# Altium PCB PCB2.PcbDoc
Units mm, origin at the board's own origin, x right, y up, seen from the top; angles counter-clockwise.
Board outline 25 x 50 mm, 2 copper layers (Top Layer, Bottom Layer); 50 components, 38 nets, 138 pads, 9 vias.
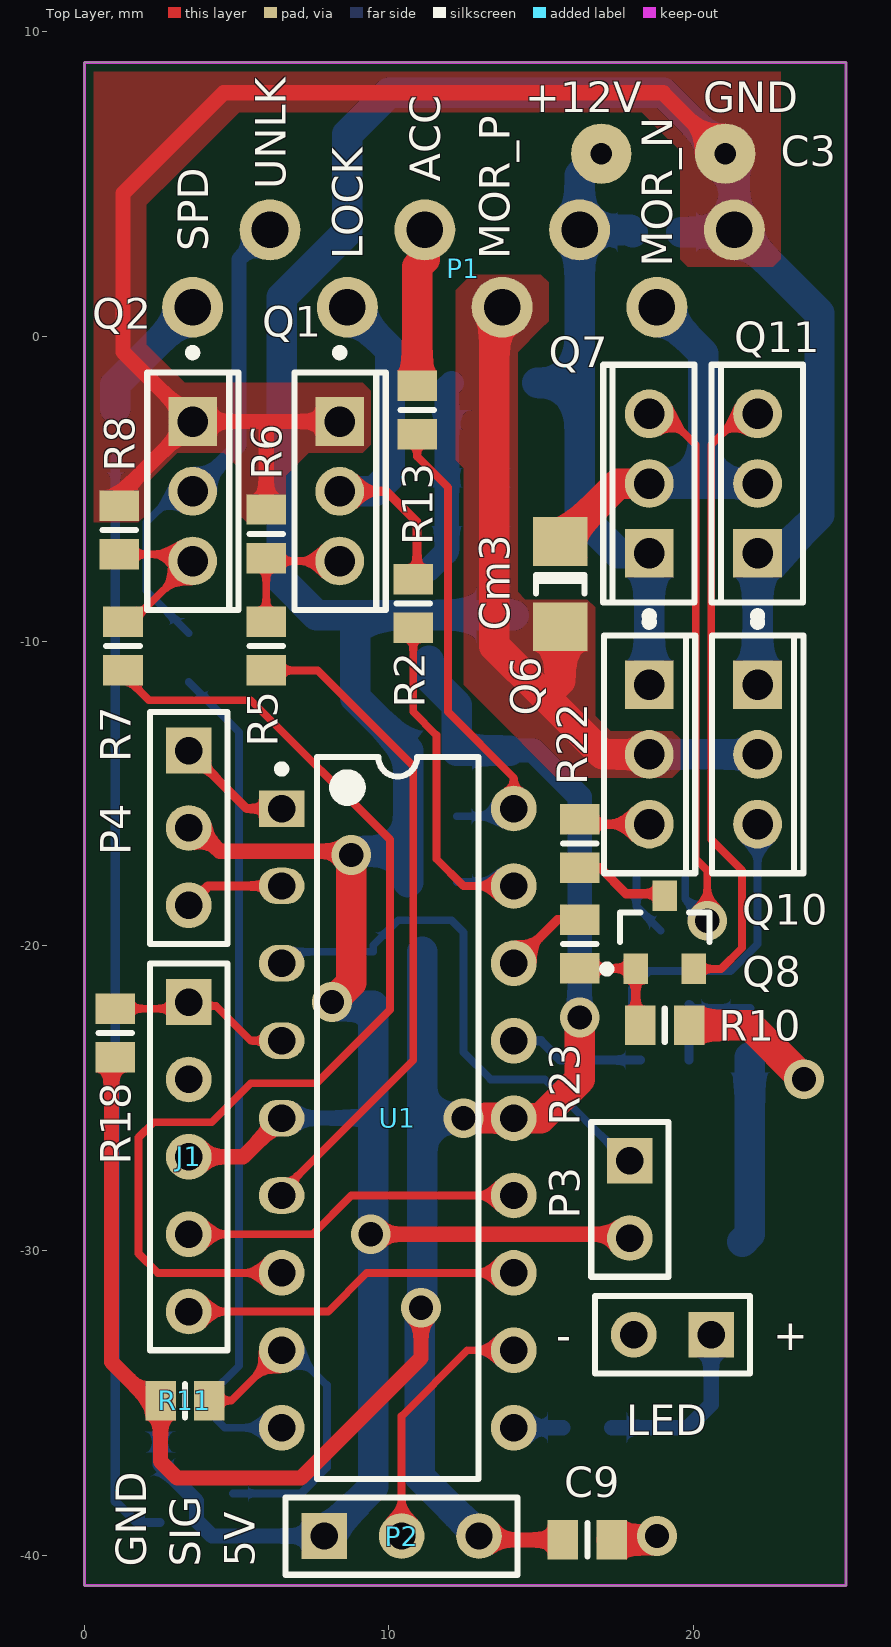
[diagram p0: Top Layer view]
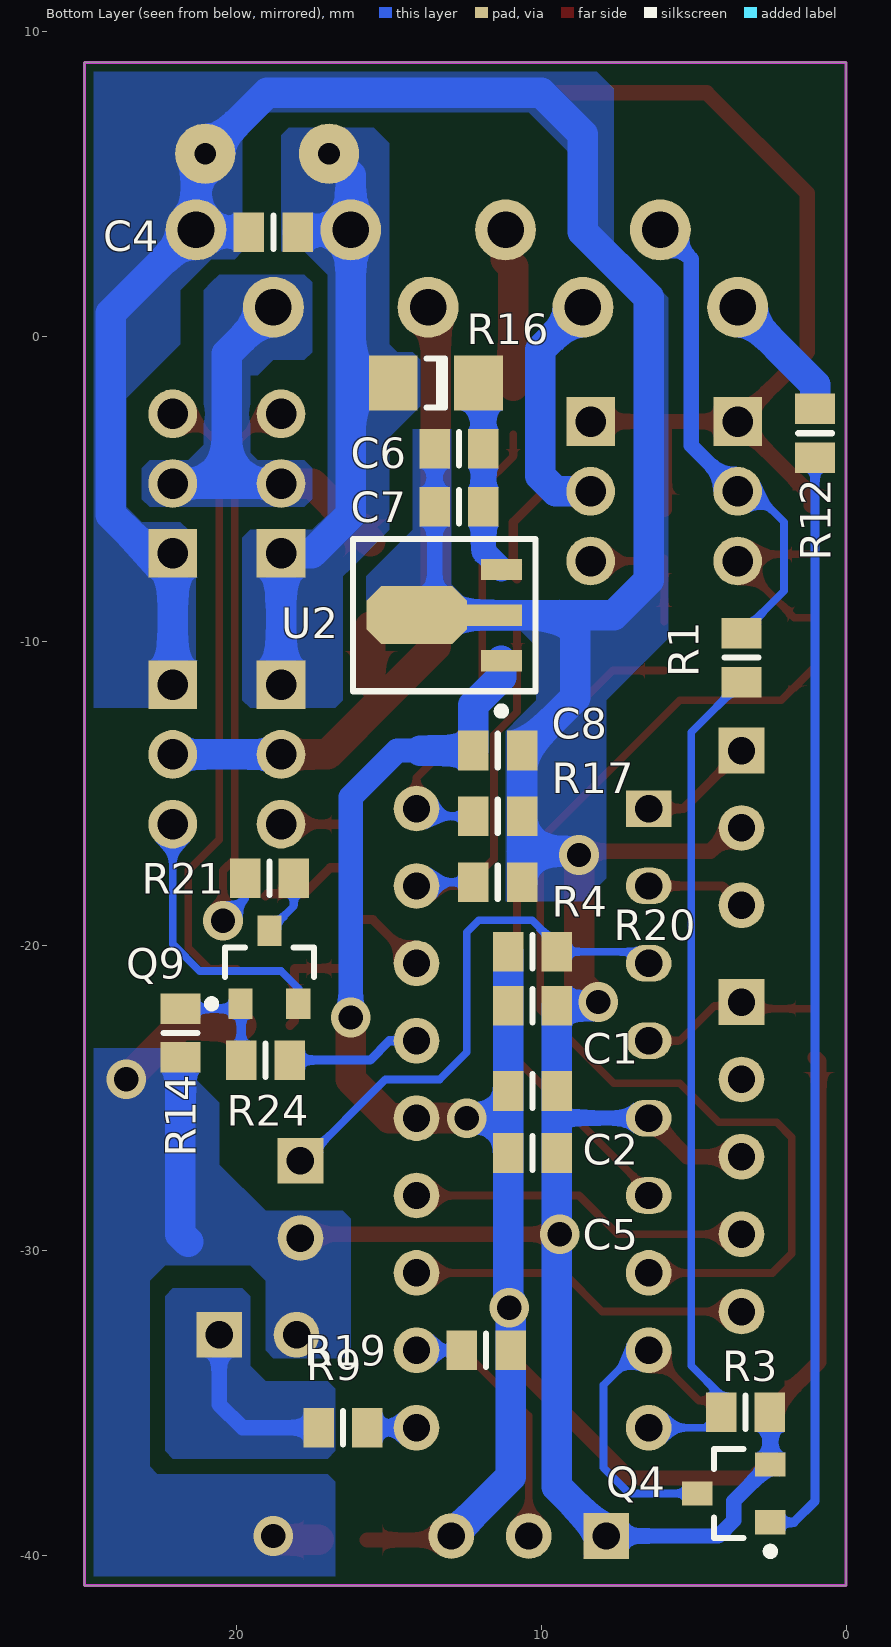
[diagram p1: Bottom Layer view, seen from below]

## Layer stack, top to bottom
Top Solder: solder mask 0.0102, Solder Resist, Dk 3.5
Top Layer: signal copper 0.0356
Dielectric1: dielectric 0.32, FR-4, Dk 4.8
Bottom Layer: signal copper 0.0356
Bottom Solder: solder mask 0.0102, Solder Resist, Dk 3.5

## Board outline
0,-41 0,9 25,9 25,-41

## Design rules (kind name [scope] priority, off if disabled: settings)
Clearance [All] p1: gap=0.254
HoleToHoleClearance [All] p1 off: gap=0.254 allowstackedmicrovias=TRUE
MinimumSolderMaskSliver [All] p1 off: minsoldermaskwidth=0.254
PolygonConnect [All] p1: connectstyle=Direct reliefconductorwidth=0.254 reliefentries=4 polygonreliefangle="90 Angle" airgapwidth=0.254
RoutingVias [All] p1: holewidth=0.711 width=1.27 viastyle="Through Hole" minholewidth=0.711 minwidth=1.27 maxholewidth=3 maxwidth=2
SilkToSolderMaskClearance SilkscreenOverComponentPads [IsPad] p1 off: minsilkscreentomaskgap=0.254 clearancetoexposedcopper=TRUE
SolderMaskExpansion [All] p1: expansion=0.102
Width [All] p1: maxlimit=2 minlimit=0.254 preferedwidth=0.3
27 further rules are at their usual default settings.

## Components (designator, comment, footprint, x,y, rotation, side; value= is the part's Value field where it differs from the comment)
C1 "Cap Semi" RESC2012L 10.287,-21.971 r0 bottom
C2 "Cap Semi" RESC2012L 10.287,-24.765 r0 bottom
C3 "Cap Pol3" CAPU150-175K 19,6 r0 top
C4 "Cap Semi" RESC2012L 18.796,3.429 r180 bottom
C5 "Cap Semi" RESC2012L 10.287,-26.797 r0 bottom
C6 "Cap Semi" RESC2012L 12.7,-3.683 r180 bottom
C7 "Cap Semi" RESC2012L 12.7,-5.588 r180 bottom
C8 "Cap Semi" RESC2012L 11.43,-13.589 r0 bottom
C9 "Cap Semi" RESC2012L 16.51,-39.497 r180 top
Cm3 "" 1206 15.621,-8.128 r270 top
J1 "programer" HDR1x5 3.429,-21.844 r270 top
LED "Header 2" HDR1X2 20.574,-32.766 r180 top
P1 "Header 8" P8_150 8,3.5 r180 top
P2 "touch_bt" HDR1X3 7.874,-39.37 r0 top
P3 "Header 2" HDR1X2 17.907,-27.051 r270 top
P4 "touch_bt" HDR1X3 3.429,-13.589 r270 top
Q1 "2SD882" ONSC-TO-225-3-77-09 8.382,-5.08 r0 top
Q2 "2SD882" ONSC-TO-225-3-77-09 3.556,-5.08 r0 top
Q4 "C1815" ONSC-CPA-3_V 3.683,-37.973 r0 bottom
Q6 "2SB772" ONSC-TO-225-3-77-09 18.542,-13.716 r0 top
Q7 "2SB772" ONSC-TO-225-3-77-09 18.542,-4.826 r180 top
Q8 "C1815" ONSC-CPA-3_V 19.05,-19.558 r90 top
Q9 "C1815" ONSC-CPA-3_V 18.923,-20.701 r90 bottom
Q10 "2SD882" ONSC-TO-225-3-77-09 22.098,-13.716 r0 top
Q11 "2SD882" ONSC-TO-225-3-77-09 22.098,-4.826 r180 top
R1 "Res2" RESC2012L 3.429,-10.541 r270 bottom
R2 "Res2" RESC2012L 10.795,-8.763 r270 top
R3 "Res2" RESC2012L 3.302,-35.306 r0 bottom
R4 "Res2" RESC2012L 11.43,-17.907 r180 bottom
R5 "470" RESC2012L 5.969,-10.16 r90 top
R6 "Res2" RESC2012L 5.969,-6.477 r90 top
R7 "470" RESC2012L 1.27,-10.16 r270 top
R8 "Res2" RESC2012L 1.143,-6.35 r90 top
R9 "Res2" RESC2012L 16.51,-35.814 r180 bottom
R10 "Res2" RESC2012L 19.05,-22.606 r0 top
R11 "470" RESC2012L 3.302,-34.925 r0 top
R12 "10K" RESC2012L 1.016,-3.175 r270 bottom
R13 "Res2" RESC2012L 10.922,-2.413 r90 top
R14 "Res2" RESC2012L 21.844,-22.86 r270 bottom
R16 "Res2" 1206 13.462,-1.524 r0 bottom
R17 "Res2" RESC2012L 11.43,-15.748 r0 bottom
R18 "Res2" RESC2012L 1.016,-22.86 r90 top
R19 "Res2" RESC2012L 11.811,-33.274 r0 bottom
R20 "Res2" RESC2012L 10.287,-20.193 r180 bottom
R21 "Res2" RESC2012L 18.923,-17.78 r180 bottom
R22 "Res2" RESC2012L 16.256,-16.637 r270 top
R23 "Res2" RESC2012L 16.256,-19.939 r270 top
R24 "Res2" RESC2012L 19.05,-23.749 r180 bottom
U1 "PIC18F1220-E/P" PDIP300-P18 10.287,-25.654 r0 top locked
U2 "µA78L05ACPKR" PK03 12.7,-9.144 r270 bottom

## Footprints (in the part's own frame and the unit in brackets; to place one, negate y for a bottom-side part, rotate by r counter-clockwise, add the part's x,y. Pads: shape width x height; smd on the part's side, far side on the other; paste and mask are expansions set on the pad)
1206 [mm] "Chip Capacitor; Body 3.2 x 1.6 mm (LxW typ)"
  rect 1.6x1.8 smd: 1(-1.4,0) 2(1.4,0)
  silkscreen extent -0.3,-0.8 0.3,0.8
CAPU150-175K [mil]
  round 78 hole 28: 1(-80,0) 2(80,0)
HDR1X2 [mm] "Connector; Header; 2 Position"
  rect 1.5x1.5 hole 0.9: 1(0,0)
  round 1.5 hole 0.9: 2(2.54,0)
  silkscreen extent -1.27,-1.27 3.81,1.27
HDR1X3 [mm] "Connector; Header; 3 Position"
  rect 1.5x1.5 hole 0.9: 1(0,0)
  round 1.5 hole 0.9: 2(2.54,0) 3(5.08,0)
  silkscreen extent -1.27,-1.27 6.35,1.27
HDR1x5 [mm] "Connector; Header; 5 Position"
  rect 1.5x1.5 hole 0.9: 1(0,0)
  round 1.5 hole 0.9: 2(2.54,0) 3(5.08,0) 4(7.62,0) 5(10.16,0)
  silkscreen extent -1.27,-1.27 11.43,1.27
ONSC-CPA-3_V [mm] "SOT23, 3-Leads, Body 2.93x1.3mm, Pitch 0.95mm"
  rect 1x0.8 smd: 1(-1.2,0.95) 2(-1.2,-0.95) 3(1.2,0)
  silkscreen extent -1.32,-1.47 0.65,2.02, body extent -0.65,-1.47 0.65,1.47, height 1.3
ONSC-TO-225-3-77-09 [mm] "FM, 3-Leads, Body 7.8x3mm, Pitch 2.29mm"
  rect 1.6x1.6 hole 1: 1(0,2.29)
  round 1.6 hole 1: 2(0,0) 3(0,-2.29)
  silkscreen extent -1.49,-3.9 1.51,4.67, body extent -1.49,-3.9 1.51,3.9, height 13.64
P8_150 [mm]
  round 2 hole 1.2 mask+0.001: 1(-13.335,0) 2(-10.795,2.54) 3(-8.255,0) 4(-5.715,2.54) 5(-3.175,0) 6(-0.635,2.54) 7(1.905,0) 8(4.445,2.54)
PDIP300-P18 [mm] "DIP, 18-Leads, Row Spacing 7.62mm, Pitch 2.54mm, Body 22.9x6.6mm"
  rect 1.5x1.2 hole 0.9: 1(-3.81,10.16)
  oval 1.5x1.2 hole 0.9: 2(-3.81,7.62) 3(-3.81,5.08) 4(-3.81,2.54) 5(-3.81,0) 6(-3.81,-2.54)
  round 1.5 hole 0.9: 7(-3.81,-5.08) 8(-3.81,-7.62) 9(-3.81,-10.16) 10(3.81,-10.16) 11(3.81,-7.62) 12(3.81,-5.08) 13(3.81,-2.54) 14(3.81,0) 15(3.81,2.54) 16(3.81,5.08) 17(3.81,7.62) 18(3.81,10.16)
  silkscreen extent -3.93,-11.85 2.65,11.85, body extent -3.6,-11.8 3.6,11.8, height 5.34
PK03 [mm] "SOT-89; Body 4.6 x 4.25 mm, inc. leads (LxW max)"
  rect 0.7x1.35 smd: 1(1.5,1.388) 3(-1.5,1.388)
  rect 0.7x1.8 smd: 2(0,1.162)
  oct 1.9x3.3 smd: 4(0,-1.388)
  silkscreen extent -2.5,-3.49 3.27,2.51
RESC2012L [mm] "Chip Resistor, Body 2.0x1.3mm, IPC High Density"
  rect 1x1.3 smd: 1(-0.8,0) 2(0.8,0)
  silkscreen extent 0,-0.55 0,0.55, body extent -1.07,-0.7 1.07,0.7, height 0.65

## Part data
C1 C2 C4 C5 C6 C7 C8 C9: "Capacitor (Semiconductor SIM Model)"
C3: "Polarized Capacitor (Surface Mount)"
Cm3: library part CAP, "Capacitor"
J1: library part CON5, "Connector"
LED P3: "Header, 2-Pin"
P1: "Header, 8-Pin"
P2 P4: library part "Header 3", "Header, 3-Pin"
Q1 Q2 Q10 Q11: library part MJE340, "Plastic Medium-Power NPN Silicon Transistor, 3-Pin TO-225, Bulk Box"
Q4 Q8 Q9: library part 2SC2812N6-CPA-TB-E, "Bipolar Transistor, 50 V, 150 mA, Low VCE(sat), NPN Single, 3-Pin CPA, Pb-Free, Tape and Reel"
Q6 Q7: library part MJE350, "Plastic Medium-Power PNP Silicon Transistor, 3-Pin TO-225, Bulk Box"
R1 R2 R3 R4 R6 R8: library part RES2, "Resistor"
R5 R7 R11 R12: library part RES2
R9 R10 R13 R14 R16 R17 R18 R19 R20 R21 R22 R23 R24: "Resistor"
U1: "High Performance, Enhanced Flash Microcontroller with 10-Bit A/D and nanoWatt Technology, 4K Flash, 18-Pin PDIP, Extended Temperature"
U2: "Positive-Voltage Regulator"

## Via types
v1: diameter 1.3, hole 0.8, Top Layer to Bottom Layer, 9 vias

## Nets (pads, with @x,y where several pads share a name; then routed paths per layer and width w, separated by ;. In a path a pad name is that pad's centre, name@x,y a point inside that pad or via, vN(x,y) a via of type N, cw(c..) or ccw(c..) an arc to the next point about the centre after c; other vN are vias at no path point)
12V: C3.1 C4.2 P1.3 Q6.1 Q7.1 R16.2 | length 22.4
  Top Layer w1: P1.3 P1.3@16.256,3.499
  Bottom Layer w1: R16.2 16.255,-1.524 ; C3.1 16.255,5.287 P1.3 ; C4.2 17.925,3.5 P1.3 ; Q6.1 Q7.1 17.53,-7.116 16.255,-5.841 16.255,-1.524 ; 16.255,-1.524 P1.3
+5V: C1.2 C2.2 C5.2 C8.2 C9.2 P2.3 R11.1 R18.1 R19.1 R20.1 U1.14 U2.1 | length 72.5
  Top Layer w0.5: R18.1 0.889,-23.787 0.889,-33.655 2.159,-34.925 R11.1 2.502,-36.919 3.048,-37.465 7.112,-37.465 11.049,-33.528 v1(11.049,-31.877) ; P2.3 13.081,-39.497 C9.2
  Top Layer w1: v1(12.446,-25.654) U1.14 14.986,-25.654 16.256,-24.384 v1(16.256,-22.352)
  Bottom Layer w0.8: 13.97,-13.589 14.732,-13.589 16.256,-15.113 v1@16.256,-21.844
  Bottom Layer w1: C2.2@11.087,-24.638 11.087,-25.654 ; R20.1 11.087,-25.654 ; U2.1 11.312,-11.185 12.23,-12.103 C8.2 13.97,-13.589 ; v1(12.446,-25.654) 11.087,-25.654 ; P2.3 11.011,-37.427 R19.1 11.011,-31.661 11.087,-31.585 C5.2 11.087,-25.654
ACC_IN: P1.5 R13.2 | length 5.2
  Top Layer w1: R13.2 10.922,2.286 11.175,2.539 P1.5
ACC_SIG: R13.1 R17.2 U1.18 | length 15.6
  Top Layer w0.254: R13.1 10.922,-3.937 11.938,-4.953 11.938,-12.319 14.097,-14.478 U1.18
  Bottom Layer w0.254: R17.2 13.843,-15.748 U1.18
BT_IO: P2.2 R19.2 U1.11 | length 10
  Top Layer w0.254: P2.2 10.414,-35.433 12.573,-33.274 U1.11
  Bottom Layer w0.254: R19.2 U1.11
DOOR_LOCK: P1.6 Q1.2 R2.1 | length 12.9
  Top Layer w0.3: Q1.2 9.906,-5.08 10.922,-6.096 10.922,-7.836 R2.1
  Bottom Layer w1: Q1.2 9.525,-5.08 10.033,-4.572 10.033,-0.438 P1.6
DOOR_LOCK_C: R5.1 U1.6 | length 22
  Top Layer w0.254: R5.1 7.658,-10.96 10.795,-14.097 10.795,-23.749 6.477,-28.067 U1.6
DOOR_LOCK_SIG: R2.2 R4.1 U1.17 | length 12.7
  Top Layer w0.254: R2.2 10.795,-12.319 11.557,-13.081 11.557,-17.145 12.446,-18.034 U1.17
  Bottom Layer w0.254: R4.1 13.97,-17.907 U1.17
DOOR_UNLOCK: P1.7 Q2.2 R1.1 | length 15.8
  Bottom Layer w0.254: R1.1 2.032,-8.344 2.032,-6.096 3.048,-5.08 Q2.2
  Bottom Layer w0.5: Q2.2 3.579,-5.08 5.08,-3.579 5.08,2.54 6.04,3.5 P1.7
DOOR_UNLOCK_C: R7.2 U1.7 | length 35.7
  Top Layer w0.254: R7.2@1.016,-10.833 2.121,-11.938 5.461,-11.938 10.033,-16.51 10.033,-22.098 7.62,-24.511 5.461,-24.511 4.179,-25.793 2.274,-25.793 1.778,-26.289 1.778,-30.099 2.413,-30.734 U1.7
DOOR_UNLOCK_SIG: R1.2 R3.2 U1.9 | length 28.1
  Bottom Layer w0.254: R1.2 5.08,-12.992 5.08,-33.782 4.102,-34.76 R3.2 4.61,-35.814 U1.9 U1.9@6.477,-36.233
GND: C1.1 C2.1 C3.2 C4.1 C5.1 C6.1 C7.1 C8.1 C9.1 J1.3 LED.2 P1.1 P2.1 P3.2 P4.2 Q1.1 Q2.1 Q4.2 Q10.1 Q11.1 R3.1 R4.2 R6.2 R8.2 R10.2 R14.2 R17.1 U1.5 U2.2 U2.4 | length 184.6
  Top Layer w0.5: R8.2 1.143,-5.203 Q2.1 ; J1.3 5.207,-26.924 U1.5 ; P4.2 3.683,-16.129 4.445,-16.891 8.636,-16.891 v1(8.763,-17.018) ; R6.2 5.969,-2.794 5.973,-2.79 ; Q1.1 5.973,-2.79 ; v1(9.398,-29.464) 17.78,-29.464 P3.2 ; C3.2@21,6 19,8 4.571,8 1.27,4.699 1.27,-0.504 Q2.1 ; Q2.1 5.973,-2.79
  Top Layer w1: v1(8.128,-21.844) 8.763,-21.209 v1(8.763,-17.018) ; C9.1 18.669,-39.497 v1(18.796,-39.37) ; P3.2 P3.2@18.034,-29.718 ; R10.2 21.844,-22.606 v1(23.622,-24.384)
  Bottom Layer w0.5: R3.1 2.483,-35.325 Q4.2 3.683,-38.223 3.683,-38.862 4.191,-39.37 P2.1 ; U1.5 9.487,-25.654 ; C6.1 C7.1 13.5,-8.556 U2.4
  Bottom Layer w1: P2.1 9.487,-37.757 C5.1 9.487,-25.654 C2.1 C1.1 8.255,-21.971 v1(8.128,-21.844) ; v1(8.763,-17.018) 8.89,-16.891 10.63,-16.891 ; R4.2 10.63,-16.891 ; U2.4 U2.2 9.398,-9.144 ; C4.1 21.264,3.429 P1.1 ; 21.59,-29.718 21.844,-29.464 R14.2 ; Q10.1 Q11.1 22.856,-7.116 24.13,-5.842 24.13,0.762 21.392,3.5 P1.1 ; 9.398,-9.144 8.89,-9.652 8.89,-11.849 C8.1 R17.1 10.63,-16.891 ; 9.398,-9.144 7.62,-9.144 6.477,-8.001 6.477,1.283 8.636,3.442 8.636,6.636 10,8 19,8 21,6 C3.2 21.335,5.697 P1.1
LED: R9.2 U1.10 | length 1.6
  Bottom Layer w0.5: U1.10 R9.2
MO_TURN_LEFT: R24.2 U1.15 | length 4.4
  Bottom Layer w0.3: U1.15 14.986,-23.114 15.621,-23.749 R24.2
MO_TURN_RIGHT: R23.1 U1.16 | length 2.8
  Top Layer w0.3: U1.16 15.532,-19.139 R23.1
MOTOR_N: Cm3.1 P1.2 Q7.2 Q11.2 | length 13.7
  Top Layer w1: Cm3.1 17.523,-4.826 Q7.2 ; P1.2@18.74,0.96 P1.2
  Bottom Layer w1: Q7.2 20.32,-4.826 ; P1.2 20.32,-0.565 20.32,-4.826 ; Q11.2 20.32,-4.826
MOTOR_P: Cm3.2 P1.4 Q6.2 Q10.2 | length 23.8
  Top Layer w1: P1.4 13.462,0.707 13.462,-10.16 15.113,-11.811 ; Cm3.2 15.621,-11.303 15.113,-11.811 ; Q6.2 17.018,-13.716 15.113,-11.811
  Bottom Layer w1: Q6.2 Q10.2
NetC6_2: C6.2 C7.2 R16.1 U2.3 | length 6.4
  Bottom Layer w0.8: U2.3 11.9,-7.057 C7.2 C6.2 11.9,-1.686 R16.1
NetLED_1: LED.1 R9.1 | length 5.9
  Bottom Layer w0.5: R9.1 19.812,-35.814 20.574,-35.052 LED.1
NetQ1_3: Q1.3 R5.2 R6.1 | length 4.5
  Top Layer w0.254: R5.2 R6.1 6.062,-7.37 Q1.3
NetQ2_3: Q2.3 R7.1 R8.1 | length 5.8
  Top Layer w0.254: R7.1@1.016,-9.233 1.693,-9.233 Q2.3 3.336,-7.15 R8.1
NetQ4_1: Q4.1 R12.2 | length 36
  Bottom Layer w0.3: R12.2 1.016,-38.227 1.712,-38.923 Q4.1
NetQ6_3: Q6.3 R22.1 | length 2.4
  Top Layer w0.3: R22.1 16.425,-16.006 Q6.3
NetQ7_3: Q7.3 R21.1 | length 19.4
  Top Layer w0.254: Q7.3 19.046,-2.536 20.066,-3.556 20.066,-17.145 20.447,-17.526 v1(20.447,-19.177)
  Bottom Layer w0.254: R21.1 19.723,-18.453 v1(20.447,-19.177)
NetQ8_1: Q8.1 R10.1 R23.2 | length 3.8
  Top Layer w0.3: R23.2 18.081,-20.739 Q8.1 18.1,-22.456 R10.1
NetQ8_2: Q8.2 Q11.3 | length 20.8
  Top Layer w0.254: Q8.2 20.898,-20.758 21.59,-20.066 21.59,-17.526 20.574,-16.51 20.574,-3.556 21.594,-2.536 Q11.3
NetQ8_3: Q8.3 R22.2 | length 3.2
  Top Layer w0.3: R22.2 16.929,-17.437 17.78,-18.288 18.98,-18.288 Q8.3
NetQ9_1: Q9.1 R14.1 R24.1 | length 3.9
  Bottom Layer w0.3: R24.1 19.85,-21.924 19.986,-22.06 R14.1
NetQ9_2: Q9.2 Q10.3 | length 9.2
  Bottom Layer w0.254: Q9.2 17.973,-21.397 18.542,-20.828 21.209,-20.828 22.098,-19.939 Q10.3
NetQ9_3: Q9.3 R21.2 | length 2.1
  Bottom Layer w0.254: R21.2 18.123,-18.701 Q9.3
PGC: J1.5 U1.12 | length 11.2
  Top Layer w0.254: J1.5 8.001,-32.004 9.271,-30.734 U1.12
PGD: J1.4 U1.13 | length 11.2
  Top Layer w0.254: J1.4 7.493,-29.464 8.763,-28.194 U1.13
RST: J1.1 R18.2 U1.4 | length 6
  Top Layer w0.254: R18.2 3.34,-22.06 3.429,-21.971 4.318,-21.971 5.461,-23.114 U1.4
RX: P4.1 U1.1 | length 3.8
  Top Layer w0.3: P4.1 5.334,-15.494 U1.1
SPEED_LEANING: P3.1 R20.2 U1.3 | length 17.7
  Bottom Layer w0.254: U1.3 6.858,-20.193 R20.2 9.487,-19.977 10.302,-19.162 12.05,-19.162 12.446,-19.558 12.446,-23.495 13.335,-24.384 15.113,-24.384 17.78,-27.051 P3.1
SPEED_SIGNAL_I: P1.8 R12.1 | length 4.4
  Bottom Layer w1: R12.1 1.016,-1.579 P1.8
SPEED_SIGNAL_O: Q4.3 R11.2 U1.8 | length 11.2
  Top Layer w0.254: R11.2 4.826,-34.925 U1.8
  Bottom Layer w0.254: Q4.3 7.112,-37.973 7.963,-37.122 7.963,-34.417 6.82,-33.274 U1.8
TX: P4.3 U1.2 | length 3.3
  Top Layer w0.3: P4.3 4.064,-18.034 U1.2
pads on no net: J1.2

## Polygon pours and split planes (outlines as drawn)
GND on Top Layer "Bottom Layer-No Net 1" (solid, pour order 10): 22.86,2.54 22.86,6.858 22.86,9 0,9 0,-5.842 0,-6.096 1.778,-6.096 2.032,-5.842 2.032,-5.08 2.032,-4.826 2.54,-4.318 3.048,-3.81 4.064,-3.81 4.572,-3.81 4.826,-4.064 5.08,-4.318 5.08,-4.572 5.08,-5.842 5.334,-6.096 6.096,-6.096 6.35,-6.096 6.604,-5.842 6.604,-4.826 6.604,-4.572 7.112,-4.064 7.366,-3.81 8.382,-3.81 9.144,-3.81 9.398,-3.556 9.398,-2.54 9.398,-1.778 9.144,-1.524 4.064,-1.524 3.302,-1.524 2.54,-0.762 2.032,-0.254 2.032,2.54 2.032,4.318 3.048,5.334 5.08,7.366 8.382,7.366 18.288,7.366 18.796,6.858 19.558,6.096 19.558,2.794 19.558,2.54 19.812,2.286 22.606,2.286
MOTOR_P on Top Layer "Bottom Layer-No Net 1" (solid, pour order 2): 14.986,2.032 12.7,2.032 12.446,1.778 12.192,1.524 12.192,-0.508 12.192,-4.064 12.446,-4.318 12.446,-4.826 12.446,-11.43 13.208,-12.192 15.494,-14.478 17.272,-14.478 19.304,-14.478 19.558,-14.224 19.558,-13.208 19.304,-12.954 18.288,-12.954 17.272,-12.954 17.018,-12.7 16.764,-12.446 16.764,-9.652 16.764,-8.89 16.51,-8.636 14.986,-8.636 14.478,-8.636 14.224,-8.382 14.224,-3.302 14.224,-0.508 14.986,0.254 15.24,0.508 15.24,1.27 15.24,1.778
GND on Bottom Layer "Bottom Layer-No Net 1" (solid, pour order 23): 21.336,-23.368 21.336,-24.384 20.828,-24.892 20.574,-25.146 20.574,-26.924 20.574,-27.178 19.05,-28.702 18.796,-28.956 18.796,-29.464 24.638,-29.464 24.892,-29.718 25,-29.61 25,-23.368
GND on Bottom Layer "Bottom Layer-No Net 1" (solid, pour order 21): 16.764,-28.702 23.114,-28.702 25,-28.702 25,-32.512 25,-41 16.764,-41 16.764,-37.592 17.018,-37.338 19.558,-37.338 22.606,-37.338 22.86,-37.084 22.86,-35.56 22.86,-30.988 22.352,-30.48 19.558,-30.48 19.304,-30.734 19.05,-30.988 19.05,-31.75 19.05,-33.274 18.796,-33.528 16.764,-33.528 16.51,-33.528 16.256,-33.274 16.256,-30.734 16.256,-28.956 16.51,-28.702
NetLED_1 on Bottom Layer "Bottom Layer-No Net 1" (solid, pour order 19): 16.764,-34.544 16.764,-36.576 17.018,-36.83 18.796,-36.83 22.098,-36.83 22.352,-36.576 22.352,-32.512 22.352,-31.496 22.098,-31.242 21.082,-31.242 19.812,-31.242 19.558,-31.496 19.558,-32.258 19.558,-33.782 19.05,-34.29 17.018,-34.29
GND on Bottom Layer "Bottom Layer-No Net 1" (solid, pour order 14): 7.62,4.064 7.62,3.048 7.366,2.794 5.842,1.27 5.842,-0.508 5.842,-9.906 7.874,-11.938 7.874,-15.748 7.874,-17.78 8.636,-18.542 11.176,-18.542 11.176,-12.954 10.668,-12.446 10.16,-11.938 10.16,-10.16 10.414,-9.906 10.668,-9.652 12.7,-9.652 14.732,-9.652 15.748,-8.636 15.748,-7.874 14.478,-6.604 14.224,-6.35 14.224,-4.572 14.224,-3.048 12.954,-3.048 12.954,-7.62 12.954,-8.128 12.192,-8.89 8.382,-8.89 7.874,-8.89 6.858,-7.874 6.858,-3.302 6.858,1.27 7.366,1.778 8.636,3.048 8.636,3.81
GND on Bottom Layer "Bottom Layer-No Net 1" (solid, pour order 12): 20.828,9 9.906,9 8.492,9 7.62,8.128 7.62,6.604 7.62,2.426 7.48,2.286 7.988,2.794 8.636,2.794 8.636,5.588 9.652,6.604 10.414,7.366 16.51,7.366 24.638,7.366 24.638,9
GND on Bottom Layer "Bottom Layer-No Net 1" (solid, pour order 8): 19.812,2.794 19.812,9 25,9 25,-12.192 21.844,-12.192 21.59,-12.192 21.336,-11.938 21.336,-6.604 21.59,-6.35 21.844,-6.096 22.098,-6.096 23.114,-6.096 23.622,-5.588 23.622,-2.286 23.622,-2.032 23.114,-1.524 21.844,-0.254 21.844,1.27 21.844,1.524 21.082,2.286 20.828,2.54 20.066,2.54
12V on Bottom Layer "Bottom Layer-No Net 1" (solid, pour order 6): 18.034,6.858 16.256,6.858 15.494,6.858 14.986,6.35 14.986,4.318 14.986,-0.254 14.732,-0.508 14.224,-0.508 13.97,-0.762 13.97,-1.27 13.97,-2.286 14.224,-2.54 14.986,-3.302 14.986,-4.064 14.986,-6.35 16.256,-7.62 16.51,-7.874 16.51,-11.43 16.51,-11.938 16.764,-12.192 18.796,-12.192 19.558,-12.192 19.812,-11.938 19.812,-11.176 19.812,-6.604 19.558,-6.35 18.542,-6.35 17.526,-6.35 17.018,-5.842 17.018,-1.524 17.018,2.032 17.526,2.54 17.78,2.794 18.542,2.794 18.542,6.604 18.288,6.858
MOTOR_N on Bottom Layer "Bottom Layer-No Net 1" (solid, pour order 4): 17.78,2.032 19.304,2.032 20.574,2.032 20.828,1.778 21.082,1.524 21.082,0.508 21.082,-3.556 21.59,-4.064 22.352,-4.064 22.86,-4.064 23.114,-4.318 23.114,-4.826 23.114,-5.334 22.86,-5.588 20.828,-5.588 17.78,-5.588 17.526,-5.334 17.526,-4.572 17.526,-4.318 17.78,-4.064 19.05,-4.064 19.304,-4.064 19.558,-3.81 19.558,-1.27 19.304,-1.27 18.796,-0.762 17.78,-0.762 17.526,-0.508 17.526,1.778

## Keep-outs
Keep-Out Layer:
  the board outline again, w0.1

## Silkscreen, mask and mechanical layers (free items; w line width, h text height)
Top Overlay:
  text "+12V" at 14.478,7.366 h1
  text "GND" at 20.32,7.366 h1
  text "ACC" at 11.684,5.08 h1 r90
  text "UNLK" at 6.604,4.826 h1 r90
  text "SPD" at 4.064,2.794 h1 r90
  text "LOCK" at 9.144,2.54 h1 r90
  text "MOR_P" at 13.97,2.54 h1 r90
  text "MOR_N" at 19.304,2.286 h1 r90
  text "-" at 15.494,-33.274 h1
  text "+" at 22.606,-33.274 h1
  text "GND" at 2.032,-40.386 h1 r90
  text "SIG" at 3.81,-40.386 h1 r90
  text "5V" at 5.588,-40.386 h1 r90
Top Solder:
  lines w1: 13.715,0.96 13.715,0.507 13.208,0 13.208,-10.414 16.51,-13.716 18.542,-13.716
Bottom Solder:
  lines w1: 16.256,3.81 16.256,2.794 16.002,2.54 16.002,-6.096 18.288,-8.382 18.288,-11.176 ; 18.542,-4.826 22.098,-4.826 ; 18.795,0.96 20.32,-0.565 20.32,-4.826 ; 20.066,3.556 21.082,3.556 24.13,0.508 24.13,-7.874 22.606,-9.398 ; 22.098,-11.426 22.098,-7.62
Mechanical 1:
  circle w0.1: c14,-67.5 r1.75